# Altium PCB Spannungsregler print.PcbDoc
Units mm, origin at the board's own origin, x right, y up, seen from the top; angles counter-clockwise.
Board outline 152.4 x 101.6 mm, 2 copper layers (Top Layer, Bottom Layer); 37 components, 0 nets, 85 pads, 6 vias.
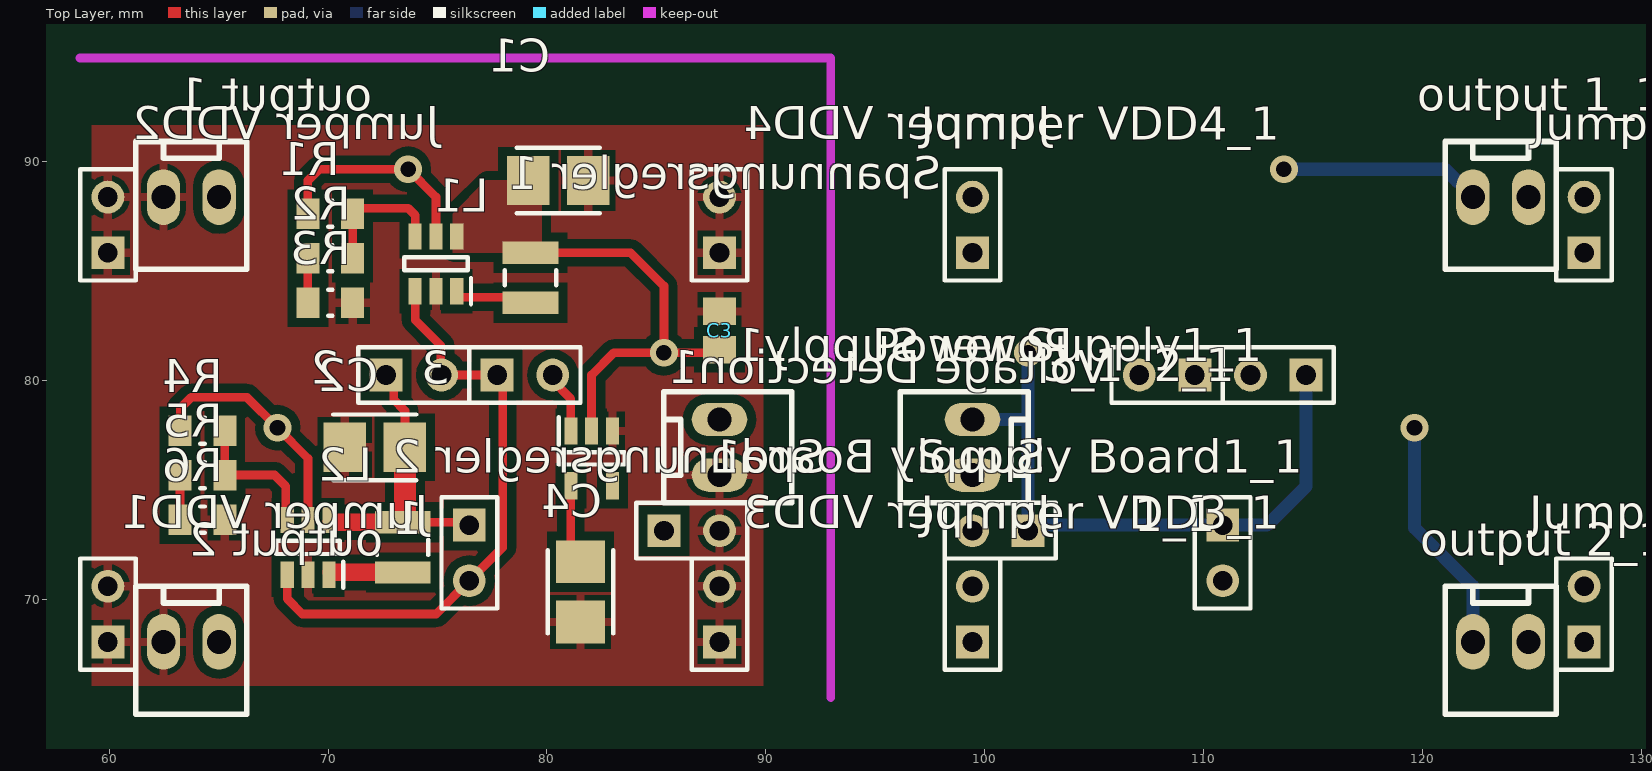
[diagram p0: Top Layer view]
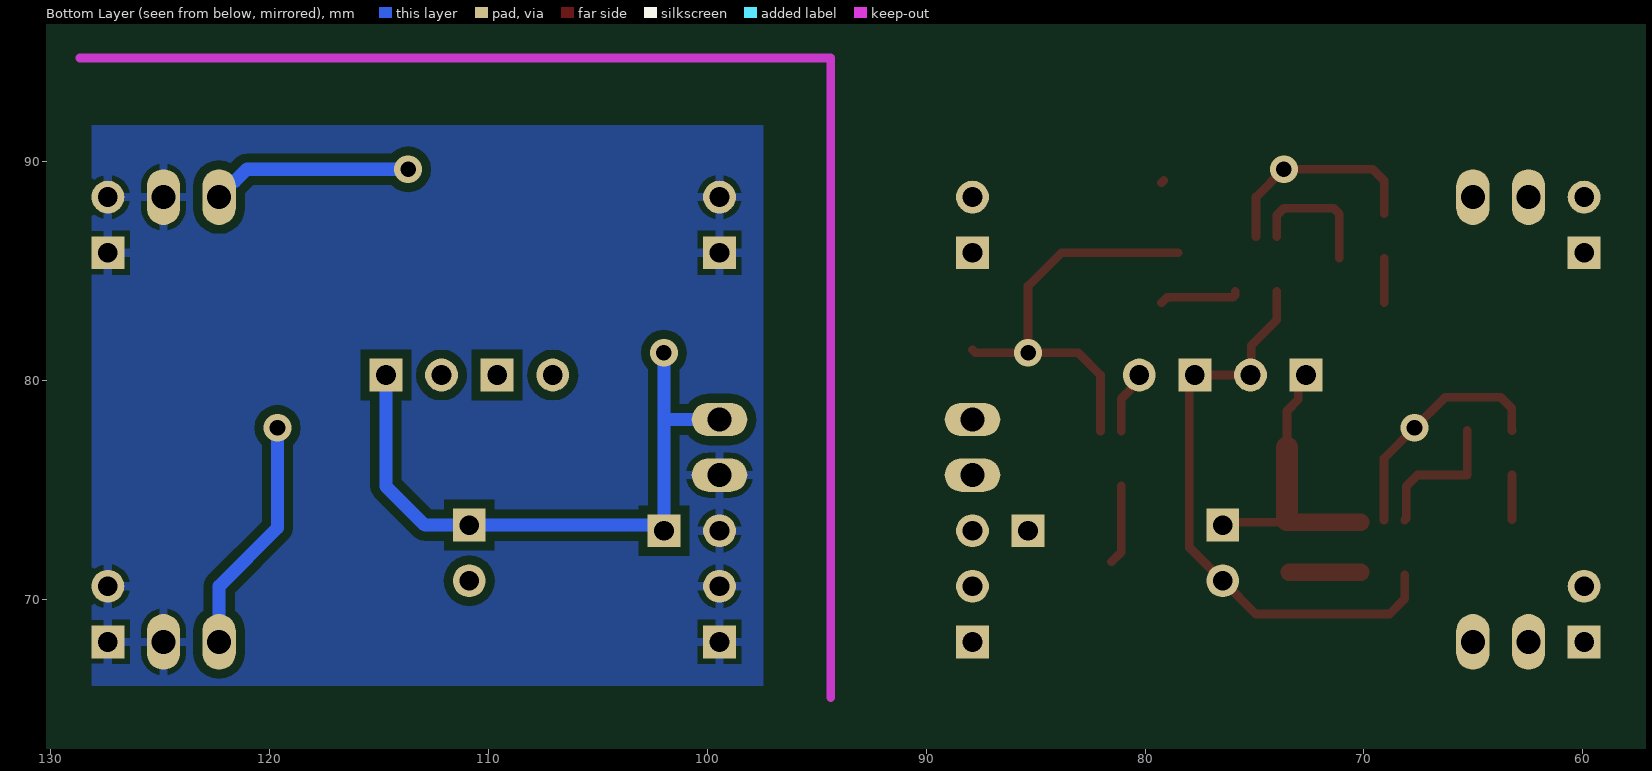
[diagram p1: Bottom Layer view, seen from below]

## Layer stack, top to bottom
Top Solder: solder mask 0.0102, Solder Resist, Dk 3.5
Top Layer: signal copper 0.0356
Dielectric 1: dielectric 0.32, FR-4, Dk 4.8
Bottom Layer: signal copper 0.0356
Bottom Solder: solder mask 0.0102, Solder Resist, Dk 3.5

## Board outline
25.4,25.4 177.8,25.4 177.8,127 25.4,127

## Design rules (kind name [scope] priority, off if disabled: settings)
Clearance [All] p1: gap=0.254 ignorepadtopadclearanceinfootprint=FALSE except(0: Arc-Hole Track-Hole SMDPad-Hole THPad-Hole Via-Hole Fill-Hole Poly-Hole Region-Hole Text-Hole)
PolygonConnect [All] p1: connectstyle=Relief reliefconductorwidth=0.254 reliefentries=4 polygonreliefangle="90 Angle" airgapwidth=0.254
RoutingVias [All] p1: holewidth=0.711 width=1.27 viastyle="Through Hole" minholewidth=0.711 minwidth=1.27 maxholewidth=0.711 maxwidth=1.27
SolderMaskExpansion [All] p1: expansion=0.102 istentingtop=FALSE
Width [All] p1: maxlimit=0.254 minlimit=0.254 preferedwidth=0.254
30 further rules are at their usual default settings.

## Components (designator, comment, footprint, x,y, rotation, side; value= is the part's Value field where it differs from the comment)
1 "Header 2" HDR1X2 76.454,73.406 r270 top
1_1 "Header 2" HDR1X2 110.871,73.406 r270 top (schematic designator 1)
2 "Header 2" HDR1X2 72.644,80.264 r0 top
2_1 "Header 2" HDR1X2 114.681,80.264 r180 top (schematic designator 2)
3 "Header 2" HDR1X2 77.724,80.264 r0 top
3_1 "Header 2" HDR1X2 109.601,80.264 r180 top (schematic designator 3)
C1 "SOLID TANTALUM CHIP CAPACITOR" "C, Typ B, Tantal, T491" 80.518,89.154 r0 top
C2 "SOLID TANTALUM CHIP CAPACITOR" "C, Typ B, Tantal, T491" 72.136,76.962 r180 top
C3 "VJ0805" VJ0805 87.884,82.296 r270 top
C4 "SOLID TANTALUM CHIP CAPACITOR" "C, Typ B, Tantal, T491" 81.534,70.358 r270 top
"Jumper VDD1" "Header 2" HDR1X2 59.944,68.072 r90 top
"Jumper VDD1_1" "Header 2" HDR1X2 127.381,68.072 r90 top (schematic designator "Jumper VDD1")
"Jumper VDD2" "Header 2" HDR1X2 59.944,85.852 r90 top
"Jumper VDD2_1" "Header 2" HDR1X2 127.381,85.852 r90 top (schematic designator "Jumper VDD2")
"Jumper VDD3" "Header 2" HDR1X2 87.884,68.072 r90 top
"Jumper VDD3_1" "Header 2" HDR1X2 99.441,68.072 r90 top (schematic designator "Jumper VDD3")
"Jumper VDD4" "Header 2" HDR1X2 87.884,85.852 r90 top
"Jumper VDD4_1" "Header 2" HDR1X2 99.441,85.852 r90 top (schematic designator "Jumper VDD4")
L1 "Coilcraft_Inductor_1008" "Coilcraft 1008CS Series" 79.248,84.707 r90 top
L2 "Coilcraft_Inductor_1008" "Coilcraft 1008CS Series" 73.406,72.39 r90 top
"output 1" "2er Stiftleiste" "2er Stiftleiste WR-WTB" 65.024,88.392 r180 top
"output 1_1" "2er Stiftleiste" "2er Stiftleiste WR-WTB" 122.301,88.392 r0 top (schematic designator "output 1")
"output 2" "2er Stiftleiste" "2er Stiftleiste WR-WTB" 65.024,68.072 r180 top
"output 2_1" "2er Stiftleiste" "2er Stiftleiste WR-WTB" 122.301,68.072 r0 top (schematic designator "output 2")
"Power Supply1" "2er Stiftleiste" "2er Stiftleiste WR-WTB" 87.884,78.232 r270 top
"Power Supply1_1" "2er Stiftleiste" "2er Stiftleiste WR-WTB" 99.441,78.232 r270 top (schematic designator "Power Supply1")
R1 "RES 0805" D12CRCW0805 70.104,87.63 r180 top
R2 "RES 0805" D12CRCW0805 70.104,85.598 r0 top
R3 "RES 0805" D12CRCW0805 70.104,83.566 r180 top
R4 "RES 0805" D12CRCW0805 64.262,77.724 r180 top
R5 "RES 0805" D12CRCW0805 64.262,75.692 r0 top
R6 "RES 0805" D12CRCW0805 64.262,73.66 r0 top
"Spannungsregler 1" "TLV61220DBVR" SOT95P280X145-6N 74.93,85.344 r90 top
"Spannungsregler 2" "TLV61220DBVR" SOT95P280X145-6N 69.088,72.39 r90 top
"Supply Board1" "Header 2" HDR1X2 85.344,73.152 r0 top
"Supply Board1_1" "Header 2" HDR1X2 101.981,73.152 r180 top (schematic designator "Supply Board1")
"Voltage Detection1" "NCP302LSN20T1G" SOT95P275X110-5N 82.042,76.454 r270 top

## Footprints (in the part's own frame and the unit in brackets; to place one, negate y for a bottom-side part, rotate by r counter-clockwise, add the part's x,y. Pads: shape width x height; smd on the part's side, far side on the other; paste and mask are expansions set on the pad)
"2er Stiftleiste WR-WTB" [mm] "2.54MM MALE LOCKING HEADER WÜRTH"
  rrect100% 1.524x2.54 hole 1.1: 1(0,0) 2(2.54,0)
  silkscreen extent -1.27,-2.54 3.81,3.3, body extent -1.27,-2.65 3.81,3.15, height 11.55
"C, Typ B, Tantal, T491" [mm] "Solid Tantalum Chip Capacitors Kemet"
  rect 1.95x2.25 smd: 1(-1.375,0) 2(1.375,0)
  silkscreen extent -1.9,-1.5 1.9,1.5, body extent -1.81,1.4 1.81,4.2, height 1.61
"Coilcraft 1008CS Series" [mm] "Chip Inductors 1008CS Series"
  rect 1.02x2.54 smd: 1(-1.145,0) 2(1.145,0)
  silkscreen extent -0.35,-1.17 0.35,1.17, body extent -1.46,1.4 1.46,4.18, height 2.03
D12CRCW0805 [mm] "Chip Resistor, 2-Leads, Body 2,1x1,3mm, IPC Medium Density"
  rect 1.05x1.4 smd: 1(-1.025,0) 2(1.025,0)
  silkscreen extent -0.1,-0.6 0.1,0.6, body extent -1.1,-0.71 1.1,0.71, height 0.51
HDR1X2 [mm] "Connector; Header; 2 Position"
  rect 1.5x1.5 hole 0.9: 1(0,0)
  round 1.5 hole 0.9: 2(2.54,0)
  silkscreen extent -1.27,-1.27 3.81,1.27
SOT95P275X110-5N [mm]
  rect 1.25x0.6 smd: 1(-1.25,-0.95) 2(-1.25,0) 3(-1.25,0.95) 4(1.25,0.95) 5(1.25,-0.95)
  silkscreen extent -1.88,-1.5 0.28,1.5, body extent -1.37,-1.5 1.37,1.5, height 1.1
SOT95P280X145-6N [mm]
  rect 1.2x0.6 smd: 1(-1.25,-0.95) 2(-1.25,0) 3(-1.25,0.95) 4(1.25,0.95) 5(1.25,0) 6(1.25,-0.95)
  silkscreen extent -1.85,-1.6 0.3,1.45, body extent -1.4,-1.45 1.4,1.45, height 1.45
VJ0805 [mm] "Ceramic Chip Capacitor Vishay Vitramon"
  rect 1.25x1.5 smd: 1(-0.875,0) 2(0.875,0)
  body extent -1.06,-39.36 1.06,-38.11, height 1.45

## Part data
1 1_1 2 2_1 3 3_1 "Jumper VDD1" "Jumper VDD1_1" "Jumper VDD2" "Jumper VDD2_1" "Jumper VDD3" "Jumper VDD3_1" "Jumper VDD4" "Jumper VDD4_1" "Supply Board1" "Supply Board1_1": "Header, 2-Pin", LatestRevisionDate=17-Jul-2002, LatestRevisionNote="Re-released for DXP Platform.", Publisher="Altium Limited"
C1 C2 C4: library part "C, Typ B, Tantal, T491, Kemet", Fitted=False
C3: "Ceramic Chip Capacitor Vishay Vitramon", Supplier Part Number 1=1650948, Fitted=False, Supplier 1=Farnell
L1 L2: "Coilcraft 1008"
"output 1" "output 1_1" "output 2" "output 2_1" "Power Supply1" "Power Supply1_1": "2er Stiftleiste WR-WTB 2,54mm"
R1 R2 R3 R4 R5 R6: "Chip Resistor 0805", Supplier Part Number 1=1738935, Fitted=False, Supplier 1=Farnell
"Spannungsregler 1" "Spannungsregler 2": "Integrated Circuit", Manufacturer_Name="Texas Instruments", Mouser2 Part Number=595-TLV61220DBVR, Datasheet Link=http://www.ti.com/lit/gpn/tlv61220, Height=1.45mm, Manufacturer_Part_Number=TLV61220DBVR, Mouser2 Price/Stock=https://www.mouser.com/Search/Refine.aspx?Keyword=595-TLV61220DBVR
"Voltage Detection1": "Integrated Circuit", Manufacturer_Name="ON Semiconductor", Datasheet Link=http://www.onsemi.com/pub/Collateral/NCP302-D.PDF, Height=1.1mm, Manufacturer_Part_Number=NCP302LSN20T1G

## Via types
v1: diameter 1.27, hole 0.711, Top Layer to Bottom Layer, 6 vias

## Nets (pads, with @x,y where several pads share a name; then routed paths per layer and width w, separated by ;. In a path a pad name is that pad's centre, name@x,y a point inside that pad or via, vN(x,y) a via of type N, cw(c..) or ccw(c..) an arc to the next point about the centre after c; other vN are vias at no path point)
pads on no net: 1.1 1.2 1_1.1 1_1.2 2.1 2.2 2_1.1 2_1.2 3.1 3.2 3_1.1 3_1.2 "Jumper VDD1.1" "Jumper VDD1.2" "Jumper VDD1_1.1" "Jumper VDD1_1.2" "Jumper VDD2.1" "Jumper VDD2.2" "Jumper VDD2_1.1" "Jumper VDD2_1.2" "Jumper VDD3.1" "Jumper VDD3.2" "Jumper VDD3_1.1" "Jumper VDD3_1.2" "Jumper VDD4.1" "Jumper VDD4.2" "Jumper VDD4_1.1" "Jumper VDD4_1.2" "output 1.1" "output 1.2" "output 1_1.1" "output 1_1.2" "output 2.1" "output 2.2" "output 2_1.1" "output 2_1.2" "Power Supply1.1" "Power Supply1.2" "Power Supply1_1.1" "Power Supply1_1.2" "Spannungsregler 1.1" "Spannungsregler 1.2" "Spannungsregler 1.3" "Spannungsregler 1.4" "Spannungsregler 1.5" "Spannungsregler 1.6" "Spannungsregler 2.1" "Spannungsregler 2.2" "Spannungsregler 2.3" "Spannungsregler 2.4" "Spannungsregler 2.5" "Spannungsregler 2.6" "Supply Board1.1" "Supply Board1.2" "Supply Board1_1.1" "Supply Board1_1.2" "Voltage Detection1.1" "Voltage Detection1.2" "Voltage Detection1.3" "Voltage Detection1.4" "Voltage Detection1.5" C1.1 C1.2 C2.1 C2.2 C3.1 C3.2 C4.1 C4.2 L1.1 L1.2 L2.1 L2.2 R1.1 R1.2 R2.1 R2.2 R3.1 R3.2 R4.1 R4.2 R5.1 R5.2 R6.1 R6.2
copper on no net: | length 161
  Top Layer w0.4: 63.237,73.66 63.237,75.692 ; 63.237,77.724 63.246,77.733 63.246,78.74 63.754,79.248 66.294,79.248 v1(67.691,77.851) 69.088,76.454 69.088,73.64 ; 65.287,77.724 65.287,75.692 67.564,75.692 68.072,75.184 68.072,73.706 68.138,73.64 ; 68.138,71.14 68.138,70.038 68.834,69.342 74.93,69.342 76.454,70.866 77.978,72.39 77.978,80.01 77.724,80.264 75.184,80.264 75.146,80.302 75.146,81.614 73.98,82.78 73.98,84.094 ; 69.079,83.566 69.079,85.598 ; 69.079,87.63 69.079,89.145 69.596,89.662 v1(73.66,89.662) 74.93,88.392 74.93,86.594 ; 71.129,85.598 71.129,87.63 71.383,87.884 73.66,87.884 73.98,87.564 73.98,86.594 ; 72.644,80.264 72.998,79.91 72.998,79.148 73.511,78.635 73.511,76.962 ; 73.406,73.535 73.511,73.64 73.616,73.535 76.325,73.535 76.454,73.406 ; 75.88,84.094 75.88,83.92 75.98,83.82 78.99,83.82 79.248,83.562 ; 78.488,85.852 79.248,85.852 83.82,85.852 85.344,84.328 v1(85.344,81.28) ; 79.143,89.154 79.248,89.049 ; 80.264,80.264 80.264,80.011 81.092,79.183 81.092,77.704 ; 81.092,75.204 81.092,72.175 81.534,71.733 ; 82.042,77.704 82.042,80.264 83.058,81.28 v1(85.344,81.28) ; 87.884,81.421 87.743,81.28 v1(85.344,81.28)
  Top Layer w0.8: 70.138,71.245 73.406,71.245 ; 70.138,73.535 73.406,73.535
  Top Layer w1: 73.511,73.64 73.511,76.962
  Bottom Layer w0.6: 99.441,78.232 101.981,78.232 ; v1(101.981,81.28) 101.981,78.232 ; v1(113.665,89.662) 121.031,89.662 121.578,89.115 121.782,89.115 122.301,88.596 122.301,88.392 ; 114.681,80.264 114.681,75.184 112.903,73.406 110.871,73.406 102.235,73.406 101.981,73.152 101.981,78.232 ; v1(119.634,77.851) 119.634,73.279 122.301,70.612 122.301,68.072

## Polygon pours and split planes (outlines as drawn)
no net on Top Layer "NONET_L01_P004" (solid, pour order 4): 90.424,92.202 58.674,92.202 58.674,65.532 90.424,65.532
no net on Top Layer "NONET_L01_P003" (solid, pour order 3): 75.692,87.63 77.216,89.154 79.756,89.154 79.756,86.106 79.502,85.852 75.692,85.852
no net on Bottom Layer "NONET_L02_P005" (solid, pour order 5): 96.901,92.202 128.651,92.202 128.651,65.532 96.901,65.532

## Keep-outs
Top Layer:
  lines w0.4: 58.674,94.742 92.964,94.742 92.964,65.532
Bottom Layer:
  lines w0.4: 94.361,65.532 94.361,94.742 128.651,94.742